# EAGLE board HD210_MLL-Range-Extender_v006-X (EAGLE 9.6.2)
AUTHOR: by Dominik & Hardi; DATE: 2022-04-15; PROJECT: 210-MLL-Range-Extender
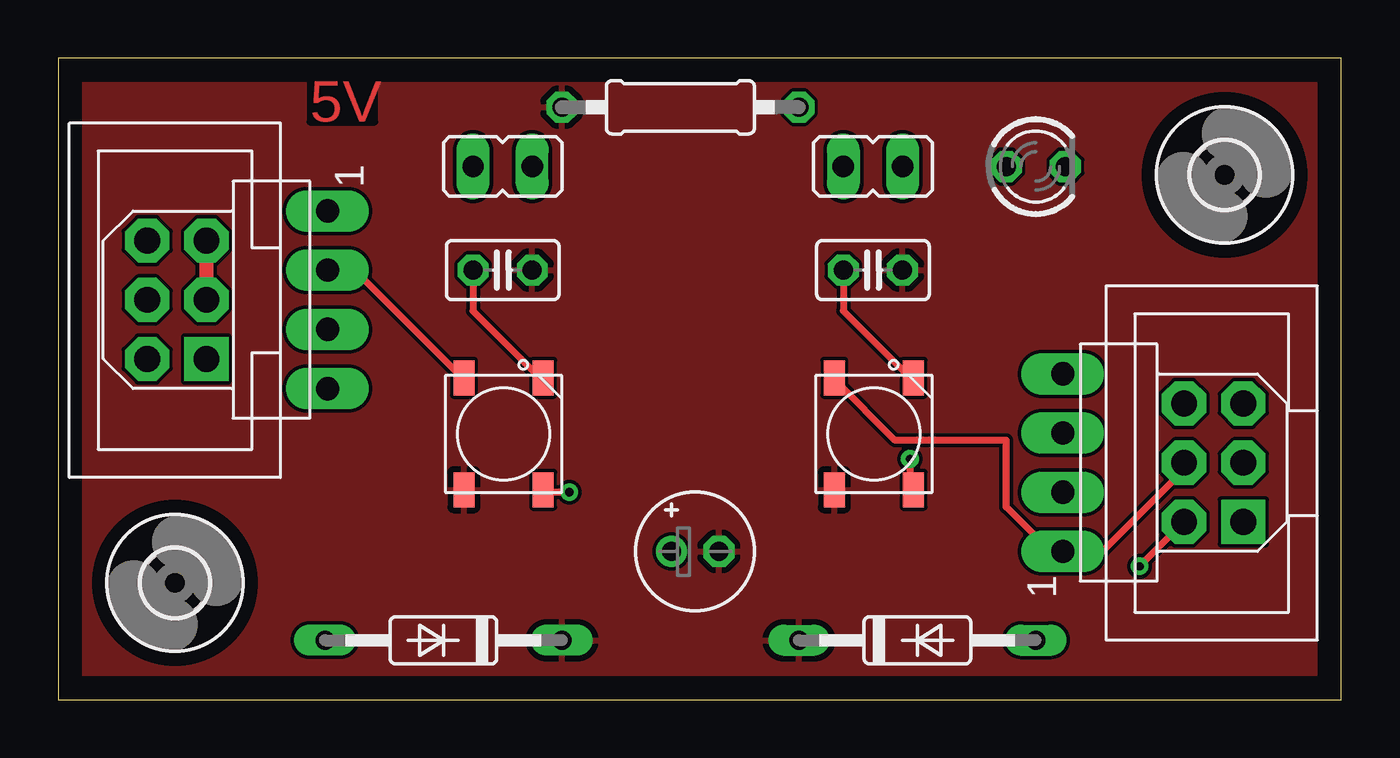
[diagram p0: board, top side]
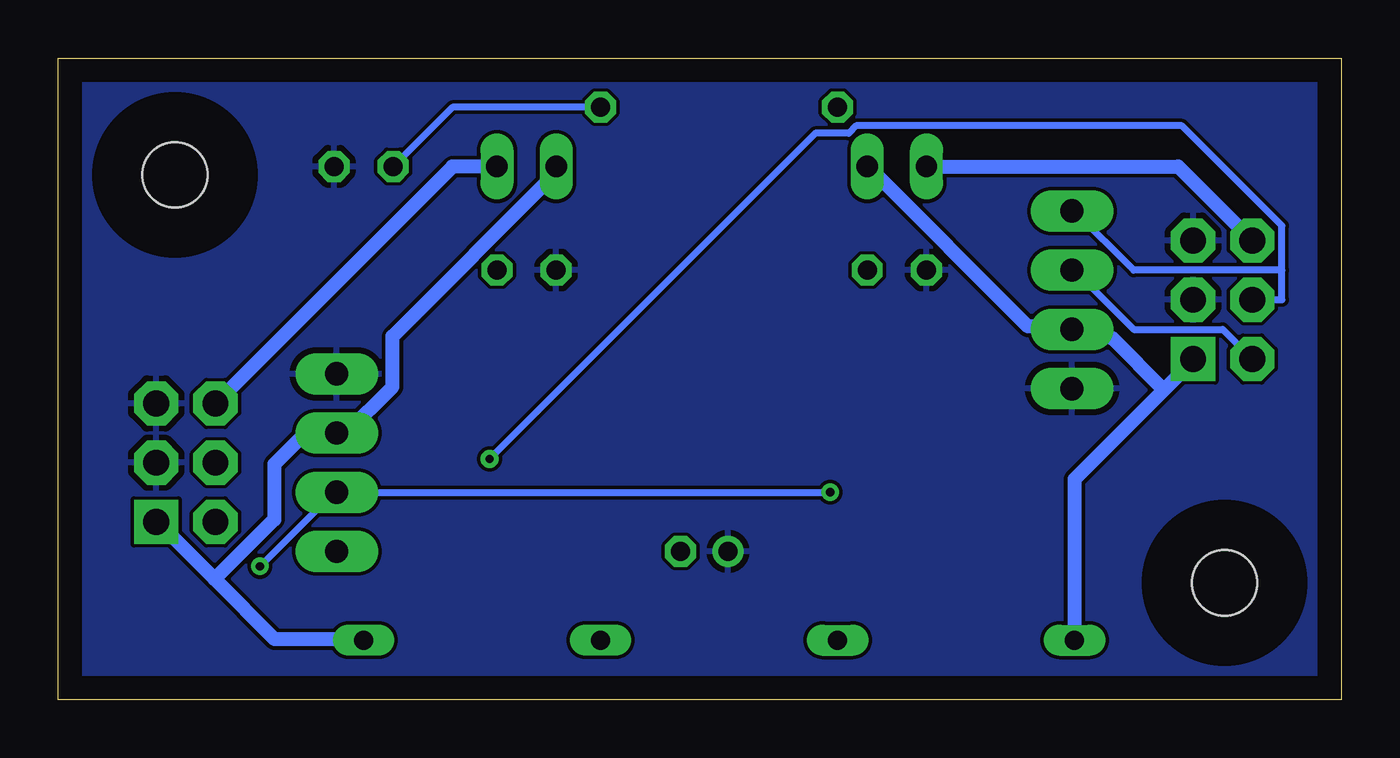
[diagram p1: board, bottom side, seen from below]

Size 55 x 27.5 mm. Coordinates in mm from the lower left corner, seen from the top.
Outline: 0,0 55,0 55,27.5 0,27.5 0,0
Copper layers (1*16): Top 0.035mm / dielectric 1.5mm / Bottom 0.035mm
Design rules "default *": minimum track width 12mil, minimum drill 0.35mm, track to track 6mil, track to pad 6mil, pad to pad 6mil, via to via 6mil, smd to smd 6mil, copper to edge 40mil, drill to drill 6mil, minimum pad ring 10mil, minimum via ring 8mil, stop-mask expansion 4mil, vias tented up to drill 16mil, thermal gap 10mil

## Footprints (pad centres in the part's own frame; a part is rotated, then mirrored left to right if it is on the bottom)
C025-025X050 = drill 0.813 octagon: 1 -1.27,0; 2 1.27,0
E2-5 = drill 0.813 pad 1.27: + -1.016,0 | drill 0.813 pad 1.27 octagon: - 1.016,0
DO35-10 = drill 0.813 long: A 5.08,0; C -5.08,0
2,8 = hole 2.8: 0,0
5050 = smd 1.5 x 0.9: DI 2.36,1.66; DO -2.44,-1.74; GND 2.36,-1.74; VCC -2.44,1.66
IDC6 = drill 1.1 pad 1.9 square: 1 -2.54,-1.27 | drill 1.1 pad 1.9 octagon: 2 -2.54,1.27; 3 0,-1.27; 4 0,1.27; 5 2.54,-1.27; 6 2.54,1.27
PSSW4-SHORT = drill 1 pad 1.778 long: P$1 3.81,-6.465; P$2 1.27,-6.465; P$3 -1.27,-6.465; P$4 -3.81,-6.465
JP1 = drill 0.914 long: 1 0,-1.27; 2 0,1.27
LED3MM = drill 0.813 octagon: A -1.27,0; K 1.27,0
0207/10 = drill 0.813 octagon: 1 -5.08,0; 2 5.08,0

## Placement (x,y rotation side)
C1  100nF  [C025-025X050]  19.05,18.41 0 top
C2  100nF  [C025-025X050]  34.92,18.41 0 top
CP1  22µF  [E2-5]  27.3,6.35 0 top
D1  BAT43  [DO35-10]  16.51,2.54 180 top
D2  BAT43  [DO35-10]  36.83,2.54 0 top
H1  MOUNT-HOLE2.8  [2,8]  5,5 0 top
H2  MOUNT-HOLE2.8  [2,8]  50,22.5 0 top
IC1  WS2812-5050  [5050]  19.05,11.43 90 top
IC2  WS2812-5050  [5050]  34.92,11.43 90 top
IN-IDC  IDC6  [IDC6]  5.08,17.14 90 top
IN-PSK  IGME2000_MLL  [PSSW4-SHORT]  5.08,17.14 90 top
JP1  [JP1]  19.05,22.86 90 top
JP2  [JP1]  34.92,22.86 270 top
LED1  [LED3MM]  41.91,22.86 0 top
OUT-IDC  IDC6  [IDC6]  49.53,10.16 90 top
OUT-PSS  IGME2000_MLL  [PSSW4-SHORT]  49.53,10.16 270 top
R1  1K  [0207/10]  26.67,25.4 180 top

## Library data of the parts
C1 C2 CP1 = rcl; SPICEPREFIX: C
D1 D2 = diode
H1 H2 = holes
IC1 IC2 IN-IDC OUT-IDC = MLL-Dominik-Hardi
IN-PSK OUT-PSS = HD_Kontakte
JP1 JP2 = jumper
LED1 = led
R1 = rcl; SPICEPREFIX: R

## Nets
+5V: C1.2 C2.2 CP1.- D1.C D2.C IC1.VCC IC2.VCC R1.2
DI-RETURN: IC2.DI OUT-IDC.4 OUT-PSS.P$1
DI-SEND: IC1.DI IN-IDC.2 IN-PSK.P$2
DO-RETURN: IC2.DO IN-IDC.4 IN-PSK.P$1
DO-SEND: IC1.DO OUT-IDC.2 OUT-PSS.P$2
GND: C1.1 C2.1 CP1.+ IC1.GND IC2.GND IN-IDC.3 IN-IDC.5 IN-PSK.P$4 LED1.K OUT-IDC.3 OUT-IDC.5 OUT-PSS.P$4
IN-5V: D1.A IN-IDC.1 IN-PSK.P$3 JP1.1
IN-P6: IN-IDC.6 JP1.2
N$1: LED1.A R1.1
OUT-5V: D2.A JP2.1 OUT-IDC.1 OUT-PSS.P$3
OUT-P6: JP2.2 OUT-IDC.6

## Tracks (layer width: path | path; a pad name or v marks a point on that pad's centre or on a via)
+5V
  pour Top: 0,0 54.61,0 55,27.5 0,27.5
DI-RETURN
  Top 0.305: IC2.DI 33.34,13.65 35.88,11.11 40.64,11.11 40.64,8.26 42.55,6.35 43.02,6.35 OUT-PSS.P$1 43.18,6.35 44.77,6.35 48.26,9.84 OUT-IDC.4
DI-SEND
  Top 0.305: IC1.DI 17.3,13.81 12.7,18.41 11.59,18.41 IN-PSK.P$2
  Bottom 0.305: IN-IDC.2 5.08,15.88 8.89,15.88 11.43,18.41 IN-PSK.P$2
DO-RETURN  (via drill 0.35)
  Top 0.305: v36.51,10.32 36.51,9.05 36.58,8.91 IC2.DO
  Bottom 0.305: v36.51,10.32 22.54,24.29 21.11,24.29 20.8,24.61 6.83,24.61 2.54,20.32 2.54,18.41 | 2.54,18.41 2.54,17.14 IN-IDC.4 | 2.54,18.41 8.89,18.41 11.43,20.95 IN-PSK.P$1
DO-SEND  (via drill 0.35)
  Top 0.305: v21.91,8.89 20.8,8.89 IC1.DO | v46.35,5.71 OUT-IDC.2
  Bottom 0.305: v21.91,8.89 43.02,8.89 OUT-PSS.P$2 43.18,8.89 v46.35,5.71
GND
  Top 0.305: C1.1 17.78,16.67 20.64,13.81 IC1.GND | C2.1 33.66,16.67 36.51,13.81 IC2.GND
  Top 0.61: IN-IDC.5 IN-IDC.3
  pour Bottom: 0,0 54.93,0 54.93,27.46 0.16,27.46 0.16,0.16
IN-5V
  Bottom 0.61: 7.59,13.28 6.4,14.48 6.4,14.55 IN-IDC.1 | 7.59,13.28 8.23,12.65 11.43,9.45 11.43,2.59 D1.A | 7.59,13.28 9.8,15.49 IN-PSK.P$3 11.54,15.96 11.58,16 13.42,16 20.27,22.85 20.27,22.86 JP1.1
IN-P6
  Bottom 0.61: IN-IDC.6 6.99,22.86 JP1.2
N$1
  Bottom 0.305: LED1.A 38.1,25.4 R1.1
OUT-5V
  Bottom 0.61: 48.3,5.17 48.62,5.49 50.75,7.62 OUT-IDC.1 | 48.3,5.17 45.72,2.59 41.91,2.59 D2.A | 48.3,5.17 45.74,7.72 45.74,10.08 44.4,11.43 OUT-PSS.P$3 42.66,11.43 40.68,13.41 40.68,15.57 33.68,22.57 33.68,22.86 JP2.1
OUT-P6
  Bottom 0.61: OUT-IDC.6 38.1,22.86 JP2.2

## Text on the board
Top: 5V
tDocu: ← | → | 5V | GND | GND | 5V | → | ←
_tDocu: IN-IDC | IN-IDC | JP1 | JP1 | JP2 | JP2 | R1 | R1 | C1 | C1 | LED1 | LED1 | C2 | C2 | IN-PSK | IN-PSK | IC1 | IC1 | IC2 | IC2 | D1 | D1 | CP1 | CP1 | D2 | D2 | OUT-PSS | OUT-PSS | OUT-IDC | OUT-IDC